# Altium PCB PCB_tete_v1.PcbDoc
Units mm, origin at the board's own origin, x right, y up, seen from the top; angles counter-clockwise.
Board outline 73.58 x 62.18 mm, 2 copper layers (Top Layer, Bottom Layer), stack 0.325 mm thick; 36 components, 30 nets, 147 pads, 30 vias.
Unrouted connection lines stored in the file: 5.
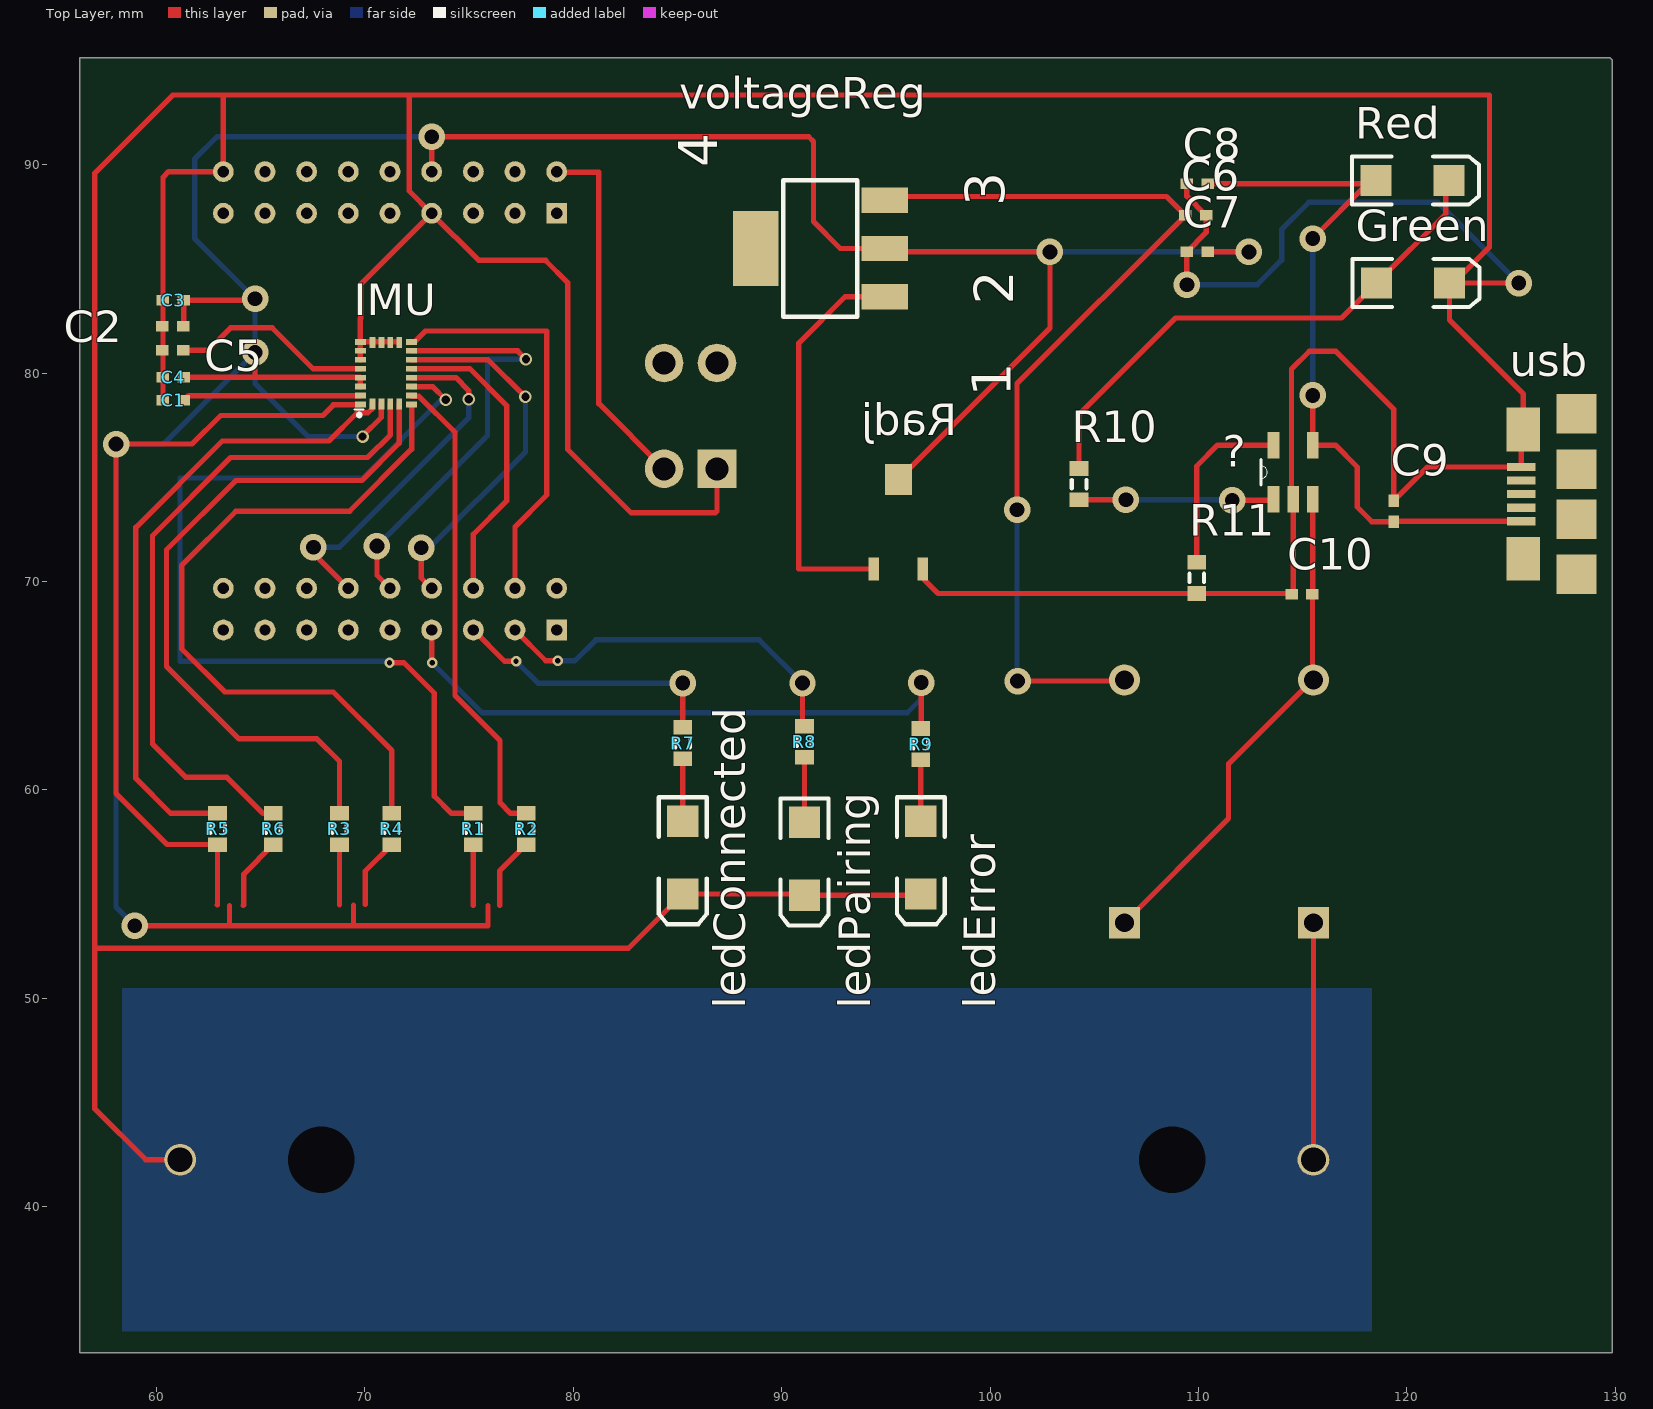
[diagram p0: Top Layer view]
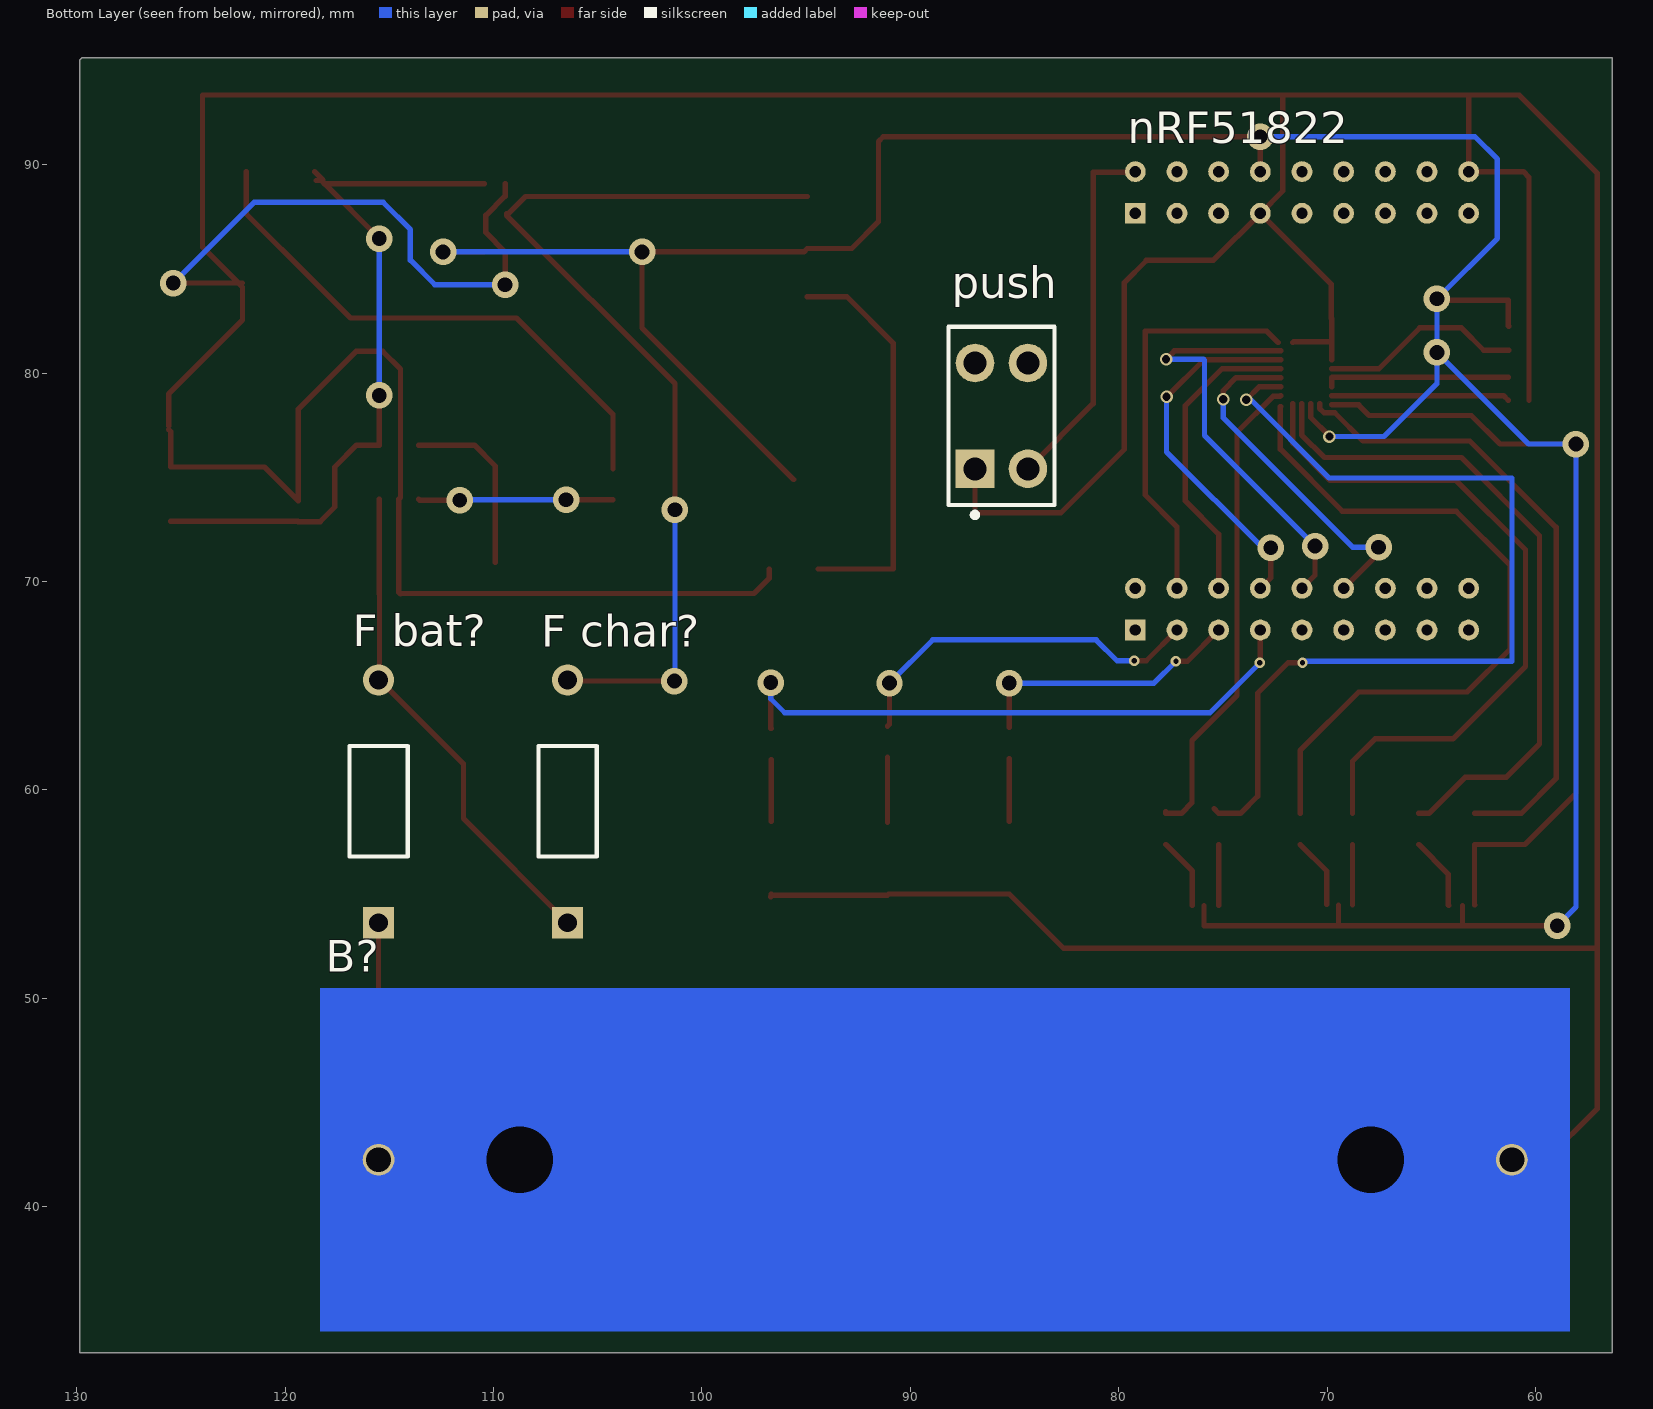
[diagram p1: Bottom Layer view, seen from below]

## Layer stack, top to bottom
Top Solder: solder mask 0.0102, Solder Resist, Dk 3.5
Top Layer: signal copper 0.0356
Dielectric 1: core 0.254, FR-4, Dk 4.2
Bottom Layer: signal copper 0.0356
Bottom Solder: solder mask 0.0102, Solder Resist, Dk 3.5

## Board outline
129.875,95.025 129.75,95.15 56.3,95.15 56.3,32.975 57.175,32.975 129.875,32.975

## Design rules (kind name [scope] priority, off if disabled: settings)
Clearance [All] p1: gap=0.254 ignorepadtopadclearanceinfootprint=FALSE except(0: Arc-Hole Track-Hole SMDPad-Hole THPad-Hole Via-Hole Fill-Hole Poly-Hole Region-Hole Text-Hole; 0.127: Arc-Arc Arc-Track Arc-SMDPad Track-Track Track-SMDPad SMDPad-SMDPad THPad-THPad Via-Via Fill-Fill Fill-Poly Fill-Region Poly-Poly Poly-Region Region-Region Text-Text)
PolygonConnect [All] p1: connectstyle=Relief reliefconductorwidth=0.254 reliefentries=4 polygonreliefangle="90 Angle" airgapwidth=0.254
RoutingVias [All] p1: holewidth=0.711 width=1.27 viastyle="Through Hole" minholewidth=0.711 minwidth=1.27 maxholewidth=0.711 maxwidth=1.27
SolderMaskExpansion [All] p1: expansion=0.102
Width [All] p1: maxlimit=0.254 minlimit=0.254 preferedwidth=0.254
30 further rules are at their usual default settings.

## Classes and differential pairs
component class power: ? B? C6 C7 C8 C9 C10 "F bat?" "F char?" Green R10 R11 Radj Red usb voltageReg
component class PCB_tete_v1: C1 C2 C3 C4 C5 IMU ledConnected ledError ledPairing nRF51822 push R1 R2 R3 R4 R5 R6 R7 R8 R9 testPoint

## Components (designator, comment, footprint, x,y, rotation, side; value= is the part's Value field where it differs from the comment)
? "MCP73831T-4ADI/OT" SOT95P280X145-5N 114.55,75.25 r90 top
B? "Battery" 6S-AA 115.525,42.25 r180 bottom
C1 "Cap" 0402 60.8,78.7 r0 top value=0.1uF
C2 "Cap" 0402 60.775,82.25 r0 top value=0.1uF
C3 "Cap" 0402 60.8,83.5 r0 top value=0.1uF
C4 "Cap" 0402 60.8,79.8 r0 top value=10uF
C5 "Cap" 0402 60.775,81.1 r0 top value=10nF
C6 "Cap Semi" 0402 109.875,87.575 r180 top value=1uF
C7 "Cap Semi" 0402 109.95,85.825 r0 top value=1uF
C8 "Cap Semi" 0402 109.95,89.1 r0 top value=10uF
C9 "Cap Semi" 0402 119.375,73.375 r270 top value=0.1uF
C10 "Cap Semi" 0402 114.975,69.4 r0 top value=10uF
"F bat?" "Fuse 1" PIN-W2/E2.8 115.525,59.45 r90 bottom
"F char?" "Fuse 1" PIN-W2/E2.8 106.45,59.45 r90 bottom
Green "LED2" 3.2X1.6X1.1 120.3,84.325 r0 top
IMU "LSM9DS1" PQFN24P43_350X300X102L35X23N 71,80 r90 top
ledConnected "LED2" 3.2X1.6X1.1 85.25,56.75 r270 top
ledError "LED2" 3.2X1.6X1.1 96.68,56.75 r270 top
ledPairing "LED2" 3.2X1.6X1.1 91.092,56.694 r270 top
nRF51822 "nRF51822 breakout" nrf551822_breakout 79.2,89.675 r270 bottom
push "SW-DPST" DPST-4 85.625,77.95 r90 bottom
R1 "Res3" J1-0603 75.194,58.125 r270 top value=10K
R2 "Res3" J1-0603 77.734,58.125 r90 top value=10K
R3 "Res3" J1-0603 68.775,58.125 r270 top value=10K
R4 "Res3" J1-0603 71.288,58.125 r90 top value=10K
R5 "Res3" J1-0603 62.925,58.125 r270 top value=10K
R6 "Res3" J1-0603 65.592,58.125 r90 top value=10K
R7 "Res3" J1-0603 85.25,62.25 r270 top value=1K
R8 "Res3" J1-0603 91.092,62.31 r270 top value=1K
R9 "Res3" J1-0603 96.68,62.195 r270 top value=1K
R10 "Res3" J1-0603 104.275,74.675 r90 top value=1K
R11 "Res3" J1-0603 109.925,70.175 r90 top value=1K
Radj "Res Tap" ST4ETA102 95.6,74.897 r0 top value=1K
Red "LED2" 3.2X1.6X1.1 120.275,89.25 r0 top
usb "10118192-0001LF" 10118192-0001LF_10118192-0001LF(Primary) 129.6,74.2 r90 top
voltageReg "AZ1117EH-3.3TRG" SOT230P700X180-4N 91.851,85.986 r90 top (schematic designator voltageReg?)

## Footprints (in the part's own frame and the unit in brackets; to place one, negate y for a bottom-side part, rotate by r counter-clockwise, add the part's x,y. Pads: shape width x height; smd on the part's side, far side on the other; paste and mask are expansions set on the pad)
3.2X1.6X1.1 [mm] "SMT LED; 2 Flat Leads"
  rect 1.5x1.5 smd: 1(-1.75,0) 2(1.75,0)
  silkscreen extent -2.9,-1.15 3.2,1.15
6S-AA [mil] "HOLDER BATTERY AA DELPHI EQUAL"
  round 60 hole 46.85 mask+7.87: 1(0,0) 2(2141.73,0)
  round 60 hole 125.98 mask+7.87: 3(266.73,0) 4(1875,0)
  Top Layer region: -110.24,324.8 2251.97,324.8 2251.97,-324.8 -110.24,-324.8
0402 [mm] "Chip Capacitor, Body 1.0x0.5mm, IPC High Density"
  rect 0.6x0.5 smd: 1(-0.5,0) 2(0.5,0)
  body extent -0.55,-0.3 0.55,0.3, height 1.3
10118192-0001LF_10118192-0001LF(Primary) [mm]
  rect 0.4x1.35 smd: 1(-1.3,4.1) 2(-0.65,4.1) 3(0,4.1) 4(0.65,4.1) 5(1.3,4.1)
  rect 1.9x1.9 smd: M1(-1.2,1.45) M2(1.2,1.45) S1(-3.85,1.45) S2(3.85,1.45)
  rect 2.1x1.6 smd: S3(-3.1,4) S4(3.1,4)
DPST-4 [mm] "Switch; 4 Leads"
  rect 1.85x1.85 hole 1.1: 1(-2.54,1.27)
  round 1.85 hole 1.1: 2(-2.54,-1.27) 3(2.54,-1.27) 4(2.54,1.27)
  silkscreen extent -4.88,-2.54 4.28,2.54
J1-0603 [mm] "Chip Resistor, Body 1.6x0.8mm, IPC High Density"
  rect 0.7x0.9 smd: 1(-0.75,0) 2(0.75,0)
  silkscreen extent -0.2,-0.35 0.2,0.35, body extent -0.85,-0.48 0.85,0.48, height 0.9
nrf551822_breakout [mm]
  round 1 hole 0.54: 0(0,16) 1(0,14) 2(0,12) 3(0,10) 4(0,8) 5(0,6) 6(0,4) 7(0,2) 8(0,0) 9(2,16) 10(2,14) 11(2,12) 12(2,10) 13(2,8) 14(2,6) 15(2,4) 16(2,2) 18(20,16) 19(20,14) 20(20,12) 21(20,10) 22(20,8) 23(20,6) 24(20,4) 25(20,2) 26(20,0) 27(22,16) 28(22,14) 29(22,12) 30(22,10) 31(22,8) 32(22,6) 33(22,4) 34(22,2)
  rect 1x1 hole 0.54: 17(2,0) 35(22,0)
PIN-W2/E2.8 [mm] "Thru-Hole; 2 Leads"
  rect 1.5x1.5 hole 0.9: 1(-5.825,0)
  round 1.5 hole 0.9: 2(5.825,0)
  silkscreen extent -2.65,-1.4 2.65,1.4
PQFN24P43_350X300X102L35X23N [mm]
  rect 0.28x0.53 smd: 1(-1.505,1.225) 6(-1.505,-1.225) 7(-1.075,-1.225) 8(-0.645,-1.225) 9(-0.215,-1.225) 10(0.215,-1.225) 11(0.645,-1.225) 12(1.075,-1.225) 13(1.505,-1.225) 18(1.505,1.225) 19(1.075,1.225) 20(0.645,1.225) 21(0.215,1.225) 22(-0.215,1.225) 23(-0.645,1.225) 24(-1.075,1.225)
  rect 0.53x0.28 smd: 2(-1.47,0.645) 3(-1.47,0.215) 4(-1.47,-0.215) 5(-1.47,-0.645) 14(1.47,-0.645) 15(1.47,-0.215) 16(1.47,0.215) 17(1.47,0.645)
  silkscreen extent -2.08,1.07 -1.75,1.5
SOT95P280X145-5N [mil]
  rect 50x22 smd: 1(-51,37) 2(-51,0) 3(-51,-37) 4(51,-37) 5(51,37)
  silkscreen extent -24,49 24,61
SOT230P700X180-4N [mil]
  rect 48x88 smd: 1(-91,-122) 2(0,-122) 3(91,-122)
  rect 141.73x86.61 smd: 4(0,122.01)
  silkscreen extent -129,-70 129,70
ST4ETA102 [mm] "pot"
  rect 0.5x1.1 smd: 1(1.175,-4.297) 3(-1.175,-4.297)
  rect 1.3x1.5 smd: 2(0,0)

## Part data
?: "IC CONTRLR LI-ION 4.40V SOT23-5", Package="SOT-23-5 Microchip", Availability=Good, MF=Microchip, MP=MCP73831T-4ADI/OT, Price="0.47 USD"
B?: "Multicell Battery", LatestRevisionDate=17-Jul-2002, LatestRevisionNote="Re-released for DXP Platform.", PackageDescription="Battery; 2 Leads", PackageReference=BAT-2, Published=24-Mar-1999, Publisher="Altium Limited"
C1 C2 C3 C4 C5: library part "Cap Semi", "Capacitor (Semiconductor SIM Model)", LatestRevisionDate=29-May-2009, LatestRevisionNote="IPC-7351 Footprint Added.", PackageDescription="Chip Capacitor", PackageReference=C1206, Published=8-Jun-2000, Publisher="Altium Limited"
C6 C7 C8 C9 C10: "Capacitor (Semiconductor SIM Model)", LatestRevisionDate=29-May-2009, LatestRevisionNote="IPC-7351 Footprint Added.", PackageDescription="Chip Capacitor", PackageReference=C1206, Published=8-Jun-2000, Publisher="Altium Limited"
"F bat?" "F char?": "Fuse", LatestRevisionDate=17-Jul-2002, LatestRevisionNote="Re-released for DXP Platform.", PackageDescription="Thru-Hole; 2 Leads", PackageReference=PIN-W2/E2.8, Published=8-Jun-2000, Publisher="Altium Limited"
Green ledConnected ledError ledPairing Red: "Typical RED, GREEN, YELLOW, AMBER GaAs LED", LatestRevisionDate=17-Jul-2002, LatestRevisionNote="Re-released for DXP Platform.", PackageDescription="SM LED; 2 Flat Leads", PackageReference=3.2X1.6X1.1, PackageVersion=Feb-2002, Published=8-Jun-2000, Publisher="Altium Limited"
IMU: "iNEMO inertial module: 3D accelerometer, 3D gyroscope, 3D magnetometer", Package=None, Availability=Unavailable, MF=STMicroelectronics, MP=LSM9DS1, Price=None
push: "Double-Pole, Single-Throw Switch", LatestRevisionDate=17-Jul-2002, LatestRevisionNote="Re-released for DXP Platform.", PackageDescription="Switch; 4 Leads", PackageReference=DPST-4, Published=24-Mar-1999, Publisher="Altium Limited"
R1 R2 R3 R4 R5 R6 R7 R8 R9 R10 R11: "Resistor", LatestRevisionDate=29-May-2009, LatestRevisionNote="IPC-7351 Footprint Added.", PackageDescription="Chip Resistor", PackageReference=J1-0603, Published=8-Jun-2000, Publisher="Altium Limited"
Radj: "Tapped Resistor", LatestRevisionDate=17-Jul-2002, LatestRevisionNote="Re-released for DXP Platform.", PackageDescription="Variable Resistor, Thru-Hole; 3 Leads", PackageReference=VR3, Published=24-Mar-1999, Publisher="Altium Limited", Set Position=0.5, Sim Note="Enter the Resistance value and the set point into parameter fields."
usb: "CONN USB MICRO B RECPT SMT R/A", Package=None, Availability=Good, MF=Amphenol, MP=10118192-0001LF, Price="0.27 USD"

## Via types
v1: diameter 1.27, hole 0.711, Top Layer to Bottom Layer, 21 vias
v2: diameter 0.6, hole 0.4, Top Layer to Bottom Layer, 5 vias
v3: diameter 0.5, hole 0.25, Top Layer to Bottom Layer, 4 vias

## Nets (pads, with @x,y where several pads share a name; then routed paths per layer and width w, separated by ;. In a path a pad name is that pad's centre, name@x,y a point inside that pad or via, vN(x,y) a via of type N, cw(c..) or ccw(c..) an arc to the next point about the centre after c; other vN are vias at no path point)
5V: ?.4 C8.2 C9.2 Red.1 usb.1 | length 35
  Top Layer w0.254: C8.2 Red.1@118.125,89.1 ; v1(115.49,78.935) ?.4 116.58,76.545 117.625,75.5 117.625,73.575 118.325,72.875 C9.2 119.4,72.9 usb.1 ; v1(115.49,86.465) Red.1@118.125,89.1 ; Red.1@118.2,89.275 Red.1@118.6,89.675 ; Red.1 118.275,89.25 Red.1@118.125,89.1
  Bottom Layer w0.254: v1(115.49,78.935) v1(115.49,86.465)
GND: ?.2 B?.2 C1.1 C2.1 C3.1 C4.1 C5.1 C6.1 C7.1 C8.1 C9.1 C10.1 Green.2 IMU.14 IMU.15 IMU.16 IMU.17 IMU.18 IMU.19 IMU.20 ledConnected.2 ledError.2 ledPairing.2 nRF51822.0 nRF51822.14 push.1 R11.1 Radj.1 usb.5 usb.S4 | length 315.5
  Top Layer w0.254: C1.1 C3.1 60.3,89.4 60.575,89.675 nRF51822.0 63.2,93.325 63.175,93.35 ; B?.2 59.475,42.25 57.034,44.691 57.034,52.4 ; IMU.20 IMU.19 IMU.18 ; IMU.14 71.61,81.505 71.215,81.505 IMU.18 ; push.1 86.895,73.38 86.815,73.3 82.775,73.3 79.725,76.35 79.725,84.35 78.675,85.4 78.675,85.425 75.45,85.425 nRF51822.14 ; ledError.2 ledError.2@96.624,54.944 ; ledError.2@96.693,54.875 ledError.2@96.624,54.944 ; Radj.1 96.775,70.153 97.503,69.425 R11.1 114.45,69.425 C10.1 114.55,69.475 ?.2 114.474,74.031 114.474,80.199 115.325,81.05 116.6,81.05 119.375,78.275 C9.1 121,75.5 usb.5 125.5,77.2 usb.S4 ; v1(109.45,84.25) C7.1 110.375,86.75 C6.1 109.45,88.5 C8.1 ; Green.2 Green.2@122.25,84.325 ; v1(125.375,84.325) Green.2@122.25,84.325 ; usb.S4@125.6,77.475 125.6,79 122.05,82.55 122.05,84.125 Green.2@122.25,84.325 ; 57.034,52.4 57.034,89.609 60.775,93.35 63.175,93.35 ; 57.034,52.4 82.65,52.4 ledConnected.2 91.036,55 ledPairing.2 ledError.2@96.624,54.944 ; 63.175,93.35 72.125,93.35 ; IMU.18 69.775,82.625 69.8,82.625 69.8,84.275 nRF51822.14 ; 72.125,93.35 123.975,93.35 123.975,86.05 Green.2@122.25,84.325 ; 72.125,93.35 72.125,88.75 nRF51822.14
  Bottom Layer w0.254: v1(109.45,84.25) 112.825,84.25 114,85.425 114,86.9 115.3,88.2 121.5,88.2 v1(125.375,84.325)
Net?_1: ?.1 R10.1 | length 9.4
  Top Layer w0.254: R10.1 v1(106.525,73.925) ; v1(111.625,73.9) 113.556,73.9 ?.1
  Bottom Layer w0.254: v1(106.525,73.925) 111.6,73.925 v1(111.625,73.9)
Net?_5: ?.5 R11.2 | length 8.7
  Top Layer w0.254: R11.2 109.925,75.55 110.92,76.545 ?.5
NetB?_1: "F bat?.1" B?.1 | length 11.4
  Top Layer w0.254: B?.1 115.525,53.625
NetC1_2: C1.2 IMU.24 | length 8.6
  Top Layer w0.254: C1.2 61.525,78.925 IMU.24
NetC5_2: C5.2 IMU.21 | length 9.8
  Top Layer w0.254: C5.2 62.475,81.1 63.55,82.175 65.55,82.175 67.51,80.215 IMU.21
NetC6_2: "F char?.2" C6.2 voltageReg.3 | length 45.7
  Top Layer w0.254: voltageReg.3@94.95,88.486 108.464,88.486 109.328,87.622 109.375,87.67 C6.2 101.3,79.5 v1(101.3,73.45) ; v1(101.325,65.225) 106.45,65.225
  Bottom Layer w0.254: v1(101.3,73.45) 101.3,65.25 v1(101.325,65.225)
NetGreen_1: Green.1 R10.2 Red.2 | length 26.2
  Top Layer w0.254: R10.2@104.275,75.4 R10.2 104.275,78.025 108.9,82.65 116.875,82.65 Green.1 121.875,87.65 Red.2@121.875,89.675
NetIMU_2: IMU.2 R5.1 | length 30.6
  Top Layer w0.254: R5.1 60.675,58.875 59,60.55 59,72.6 63.15,76.75 68.275,76.75 69.626,78.101 70.145,78.101 70.355,78.311 IMU.2
NetIMU_4: IMU.4 R6.2 | length 32.1
  Top Layer w0.254: R6.2 65.1,58.875 63.375,60.6 61.4,60.6 59.8,62.2 59.8,72.2 63.55,75.95 70.125,75.95 71.215,77.04 IMU.4
NetIMU_5: IMU.5 R3.1 | length 33.5
  Top Layer w0.254: R3.1 68.775,61.375 67.7,62.45 63.95,62.45 60.475,65.925 60.475,71.525 63.8,74.85 69.85,74.85 71.645,76.645 IMU.5
NetIMU_6: IMU.6 R4.2 | length 34.5
  Top Layer w0.254: R4.2 71.288,61.887 68.475,64.7 63.275,64.7 61.2,66.775 61.2,70.775 63.8,73.375 69.262,73.375 72.241,76.354 72.241,78.388 IMU.6@72.225,78.404
NetIMU_7: IMU.7 R2.2 | length 23
  Top Layer w0.254: IMU.7 72.261,78.889 72.595,78.889 74.319,77.165 74.319,64.531 76.475,62.375 76.475,59.388 76.988,58.875 R2.2 R2.2@77.734,58.959
NetIMU_8: IMU.8 R1.1 | length 45.3
  Top Layer w0.254: v3(71.175,66.1) 71.875,66.1 73.325,64.65 73.325,59.7 74.15,58.875 R1.1 R1.1@75.425,59.106 ; IMU.8 73.245,79.355 v2(73.875,78.725)
  Bottom Layer w0.254: v3(71.175,66.1) 71.1,66.175 61.125,66.175 61.125,74.975 69.9,74.975 73.65,78.725 v2(73.875,78.725)
NetIMU_9: IMU.9 nRF51822.21 | length 17
  Top Layer w0.254: v1(67.525,71.65) 67.525,71.35 nRF51822.21 ; IMU.9 74.365,79.785 74.975,79.175 v2(74.975,78.75)
  Bottom Layer w0.254: v1(67.525,71.65) 68.775,71.65 74.975,77.85 v2(74.975,78.75)
NetIMU_10: IMU.10 nRF51822.24 | length 14.7
  Top Layer w0.254: IMU.10 75.035,80.215 76.8,78.45 76.8,73.869 75.2,72.269 nRF51822.24
NetIMU_11: IMU.11 nRF51822.23 | length 18.1
  Top Layer w0.254: IMU.11 75.905,80.645 77.675,78.875 v2(77.7,78.875) ; v1(72.7,71.625) 72.7,70.175 nRF51822.23
  Bottom Layer w0.254: v1(72.7,71.625) 72.9,71.825 73.1,71.625 77.7,76.225 v2(77.7,78.875)
NetIMU_12: IMU.12 nRF51822.22 | length 20.9
  Top Layer w0.254: v1(70.575,71.7) 70.575,70.3 nRF51822.22 ; IMU.12 77.325,81.075 v2(77.725,80.675)
  Bottom Layer w0.254: v1(70.575,71.7) 75.88,77.005 75.88,80.62 75.936,80.675 v2(77.725,80.675)
NetIMU_13: IMU.13 nRF51822.25 | length 19.6
  Top Layer w0.254: IMU.13@72.346,81.475 72.896,82.025 78.725,82.025 78.725,74.15 77.2,72.625 nRF51822.25
NetledConnected_1: ledConnected.1 R7.2 | length 3
  Top Layer w0.254: ledConnected.1 R7.2
NetledError_1: ledError.1 R9.2 | length 2.9
  Top Layer w0.254: ledError.1 R9.2
NetledPairing_1: ledPairing.1 R8.2 | length 3.1
  Top Layer w0.254: ledPairing.1 R8.2
NetnRF51822_8: nRF51822.8 push.2 | length 17.6
  Top Layer w0.254: nRF51822.8 79.225,89.65 81.225,89.65 81.225,78.54 push.2
NetnRF51822_32: nRF51822.32 R9.1 | length 29.3
  Top Layer w0.254: nRF51822.32 73.2,66.125 v3(73.225,66.1) ; R9.1 96.7,62.965 v1(96.7,65.15)
  Bottom Layer w0.254: v3(73.225,66.1) 75.625,63.7 96.025,63.7 96.7,64.375 v1(96.7,65.15)
NetnRF51822_33: nRF51822.33 R7.1 | length 13.2
  Top Layer w0.254: nRF51822.33 76.7,66.175 v3(77.25,66.175) ; R7.1 v1(85.25,65.125)
  Bottom Layer w0.254: v3(77.25,66.175) 78.3,65.125 v1(85.25,65.125)
NetnRF51822_34: nRF51822.34 R8.1 | length 17.8
  Top Layer w0.254: nRF51822.34 78.675,66.2 v3(79.25,66.2) ; v1(91,65.125) 91,63.152 R8.1
  Bottom Layer w0.254: v3(79.25,66.2) 80.081,66.2 81.081,67.2 88.925,67.2 v1(91,65.125)
NetRadj_3: Radj.3 voltageReg.1 | length 19.5
  Top Layer w0.254: Radj.3 90.825,70.6 90.825,81.45 93.05,83.675 voltageReg.1
Vbat: "F bat?.2" "F char?.1" ?.3 C10.2 | length 24.1
  Top Layer w0.254: 106.45,53.625 111.45,58.625 111.45,61.25 115.475,65.275 C10.2 115.49,69.415 ?.3
VCC: C2.2 C3.2 C4.2 C7.2 IMU.1 IMU.3 IMU.22 IMU.23 nRF51822.5 R1.2 R2.1 R3.2 R4.1 R5.2 R6.1 Radj.2 voltageReg.2 | length 214.3
  Top Layer w0.254: v1(58.95,53.475) 63.5,53.475 ; C2.2 61.3,82.275 C3.2 64.65,83.5 v1(64.725,83.575) ; C4.2 64.7,79.8 ; 62.913,54.475 62.925,54.487 R5.2 60.5,57.375 58.05,59.825 v1(58.05,76.6) 61.7,76.6 63.075,77.975 67.975,77.975 68.482,78.482 69.762,78.482 IMU.1 ; 63.5,54.45 63.5,53.475 ; 64.158,54.45 64.183,54.475 64.183,55.966 R6.1 ; v1(64.725,81) 64.725,79.825 64.7,79.8 ; 68.775,54.493 R3.2 ; 69.45,54.475 69.45,53.475 ; IMU.23 IMU.22 69.76,79.8 64.7,79.8 ; v2(69.881,76.96) 69.881,76.981 70.785,77.885 IMU.3 ; 70.006,54.5 70.006,56.093 R4.1 ; nRF51822.5 v1(73.2,91.35) 91.3,91.35 91.525,91.125 91.525,87.275 92.814,85.986 voltageReg.2 95.111,85.825 v1(102.875,85.825) 102.875,82.172 Radj.2 ; 75.194,54.454 R1.2 ; 75.9,54.45 75.9,53.475 69.45,53.475 ; 76.464,54.454 76.464,56.105 R2.1 ; C7.2 v1(112.425,85.825) ; 63.5,53.475 69.45,53.475
  Bottom Layer w0.254: v1(58.95,53.475) 58.05,54.375 v1(58.05,76.6) 60.325,76.6 v1(64.725,81) ; v2(69.881,76.96) 67.265,76.96 64.725,79.5 v1(64.725,81) ; v1(73.2,91.35) 62.9,91.35 61.825,90.275 61.825,86.475 v1(64.725,83.575) v1(64.725,81) ; v1(102.875,85.825) v1(112.425,85.825)
pads on no net: B?.3 B?.4 nRF51822.1 nRF51822.2 nRF51822.3 nRF51822.4 nRF51822.6 nRF51822.7 nRF51822.9 nRF51822.10 nRF51822.11 nRF51822.12 nRF51822.13 nRF51822.15 nRF51822.16 nRF51822.17 nRF51822.18 nRF51822.19 nRF51822.20 nRF51822.26 nRF51822.27 nRF51822.28 nRF51822.29 nRF51822.30 nRF51822.31 nRF51822.35 push.3 push.4 usb.2 usb.3 usb.4 usb.M1 usb.M2 usb.S1 usb.S2 usb.S3 voltageReg.4

## Text inside footprints (layer, text, board x,y; h text height)
voltageReg: Top Overlay "3" at 100.69,88.017 h1.88 r90; Top Overlay "4" at 86.905,89.883 h1.88 r90; Top Overlay "1" at 100.991,78.878 h1.88 r90; Top Overlay "2" at 101.125,83.295 h1.88 r90